# Altium PCB CT_Breakout_Board - Copy.PcbDoc
Units mm, origin at the board's own origin, x right, y up, seen from the top; angles counter-clockwise.
Board outline 45.97 x 47.75 mm, 2 copper layers (Top Layer, Bottom Layer); 32 components, 14 nets, 74 pads, 10 vias.
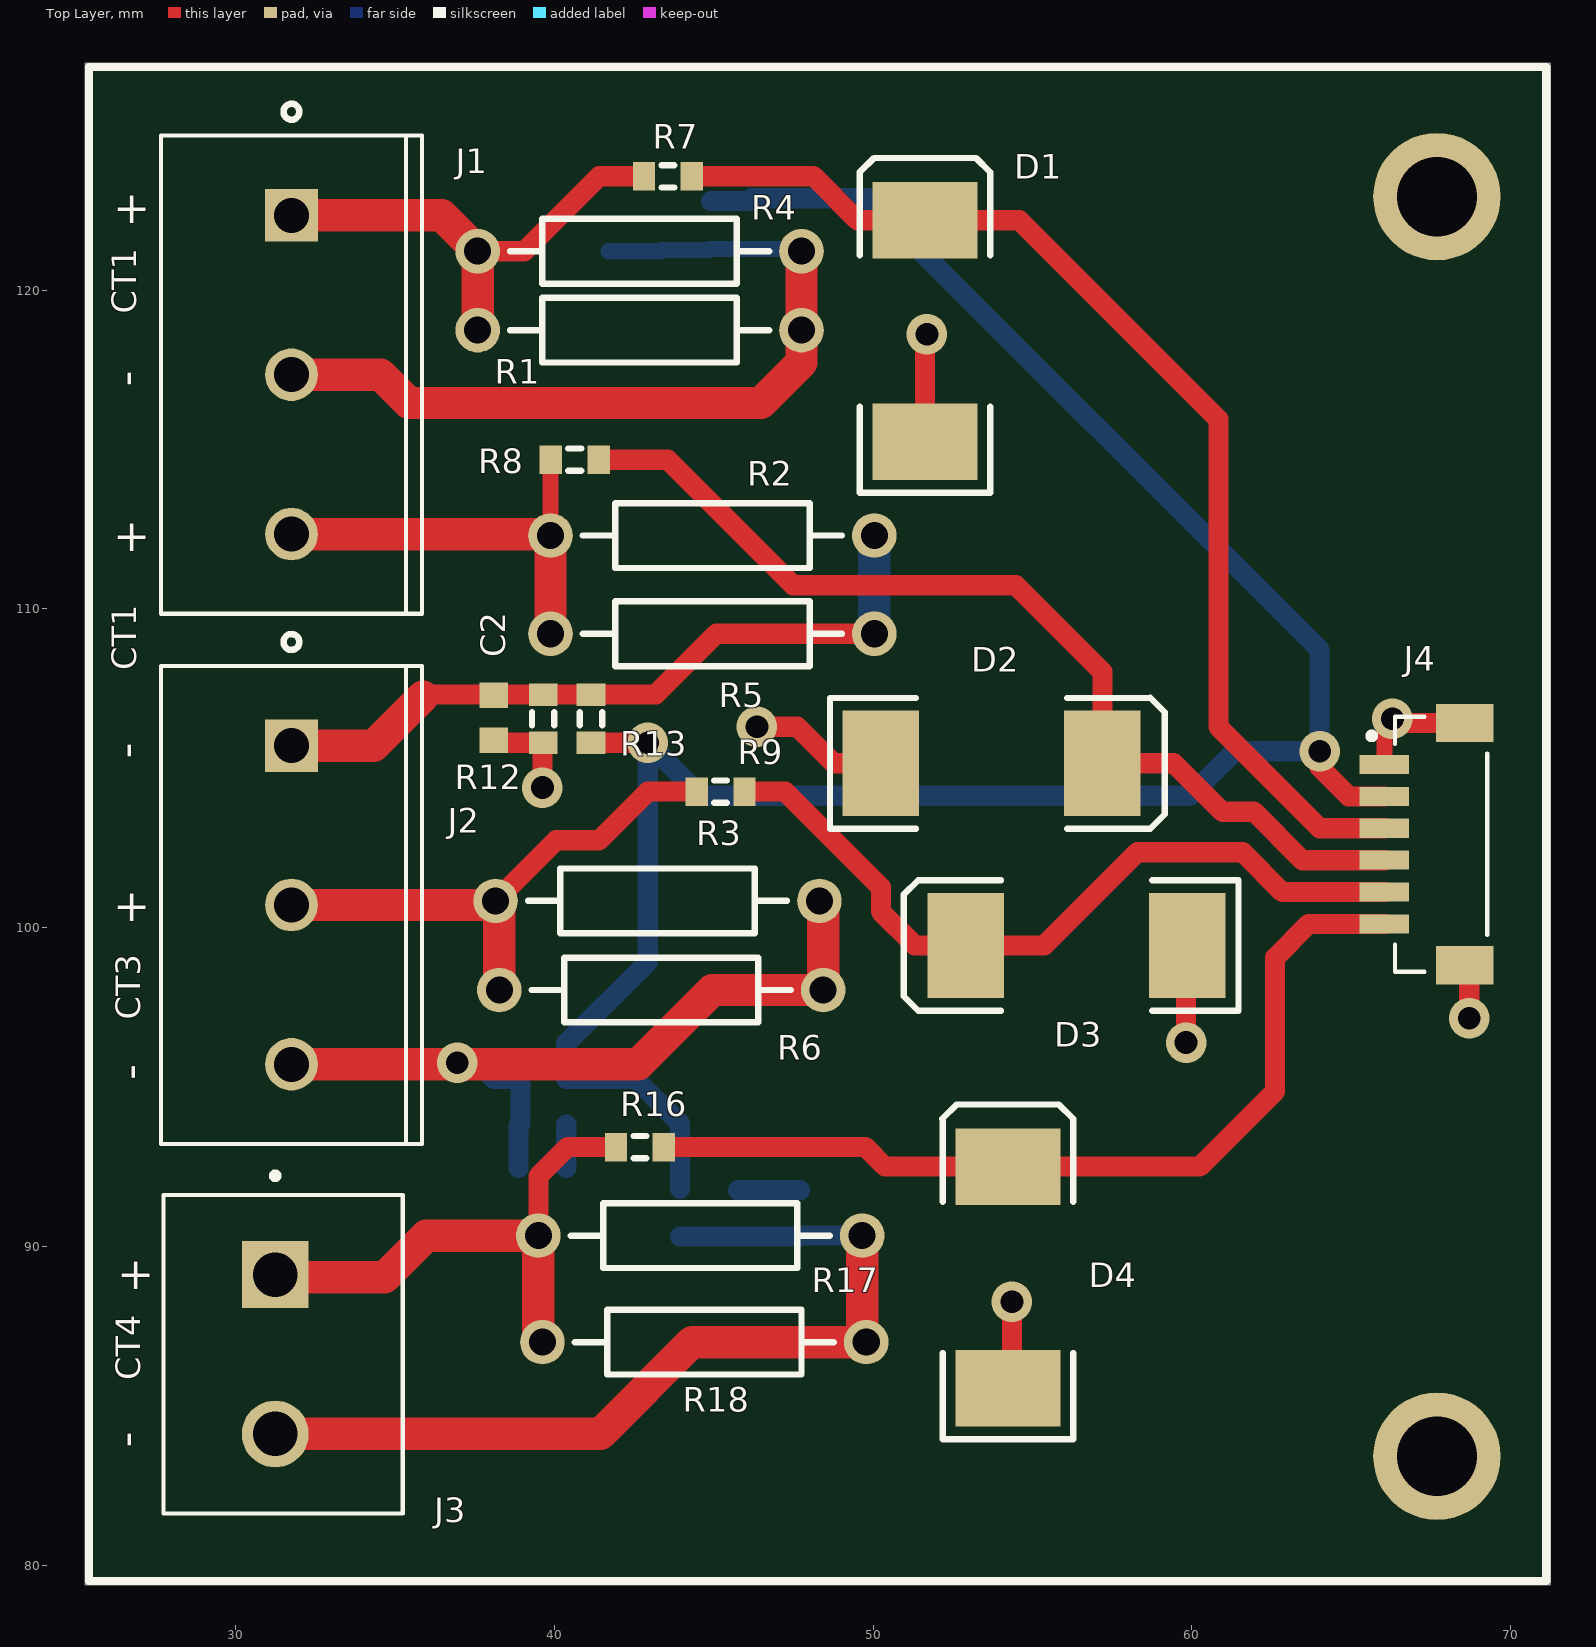
[diagram p0: Top Layer view]
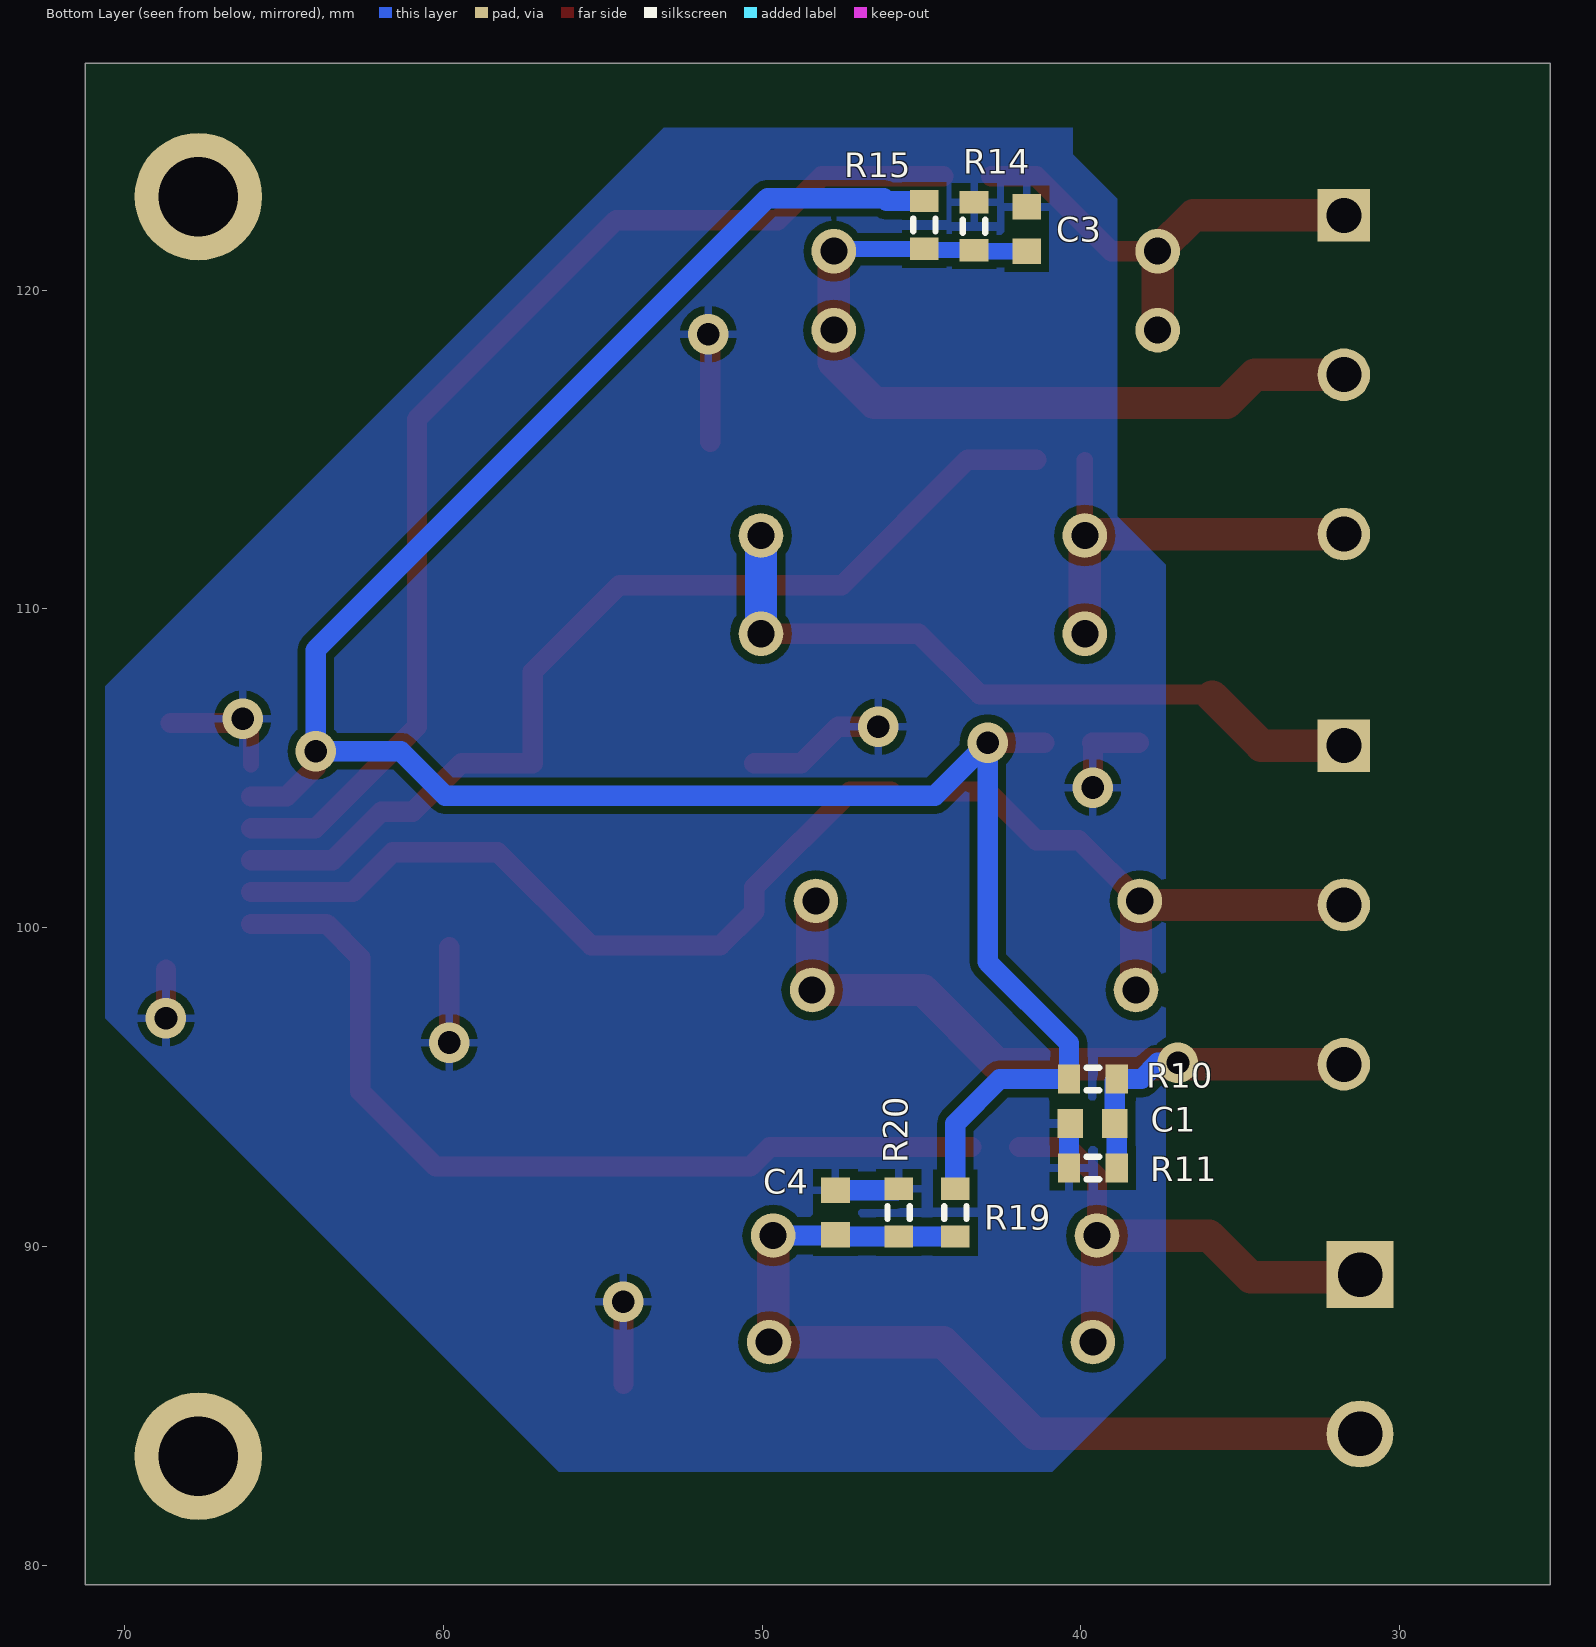
[diagram p1: Bottom Layer view, seen from below]

## Layer stack, top to bottom
Top Solder: solder mask 0.0102, Solder Resist, Dk 3.5
Top Layer: signal copper 0.0356
Dielectric 1: dielectric 0.32, FR-4, Dk 4.8
Bottom Layer: signal copper 0.0356
Bottom Solder: solder mask 0.0102, Solder Resist, Dk 3.5

## Board outline
25.273,79.375 71.247,79.375 71.247,127.127 25.273,127.127

## Design rules (kind name [scope] priority, off if disabled: settings)
Clearance [All] p1: gap=0.254 ignorepadtopadclearanceinfootprint=FALSE except(0: Arc-Hole Track-Hole SMDPad-Hole THPad-Hole Via-Hole Fill-Hole Poly-Hole Region-Hole Text-Hole)
MinimumSolderMaskSliver [All] p1: minsoldermaskwidth=0.127
PolygonConnect [All] p1: connectstyle=Relief reliefconductorwidth=0.254 reliefentries=4 polygonreliefangle="90 Angle" airgapwidth=0.254
RoutingVias [All] p1: holewidth=0.711 width=1.27 viastyle="Through Hole" minholewidth=0.711 minwidth=1.27 maxholewidth=0.711 maxwidth=1.27
SilkToSilkClearance [All] p1: silktosilkclearance=0.076
SilkToSolderMaskClearance [IsPad] p1: minsilkscreentomaskgap=0.076 clearancetoexposedcopper=TRUE
SolderMaskExpansion [All] p1: expansion=0.102
Width [All] p1: maxlimit=1.016 minlimit=0.254 preferedwidth=0.254 minimp=50.000000 maximp=50.000000 favimp=50.000000
27 further rules are at their usual default settings.

## Components (designator, comment, footprint, x,y, rotation, side; value= is the part's Value field where it differs from the comment)
C1 "Cap Semi" 1608[0603] 39.637,93.853 r180 bottom value=10uF/6V
C2 "Cap Semi" 1608[0603] 38.1,106.586 r90 top value=10uF/6V
C3 "Cap Semi" 1608[0603] 41.702,121.92 r270 bottom value=10uF/6V
C4 "Cap Semi" 1608[0603] 47.702,91.059 r270 bottom value=10uF/6V
D1 "Diode" SMC 51.627,118.721 r90 top
D2 "Diode" SMC 53.721,105.156 r0 top
D3 "Diode" SMC 56.388,99.441 r180 top
D4 "Diode" SMC 54.229,89.027 r90 top
J1 "282836-3" TE_282836-3 31.75,117.348 r270 top
J2 "282836-3" TE_282836-3 31.75,100.711 r270 top
J3 "CON22" HANDSON_KF301-2P 31.242,86.614 r270 top
J4 "BM06B-SRSS-TB(LF)(SN)" JST_BM06B-SRSS-TB(LF)(SN) 67.818,102.616 r270 top
R1 "DNC" AXIAL-0.4 42.672,118.745 r180 top value=22
R2 "DNC" AXIAL-0.4 44.958,112.301 r180 top value=22
R3 "DNC" AXIAL-0.4 43.235,100.838 r180 top value=22
R4 "22" AXIAL-0.4 42.672,121.223 r180 top
R5 "22" AXIAL-0.4 44.958,109.22 r180 top
R6 "22" AXIAL-0.4 43.353,98.044 r180 top
R7 "Res3" J1-0603 43.561,123.571 r0 top value=1K
R8 "Res3" J1-0603 40.64,114.681 r0 top value=1K
R9 "Res3" J1-0603 45.212,104.267 r0 top value=1K
R10 "Res3" J1-0603 39.624,95.25 r0 bottom value=470K
R11 "Res3" J1-0603 39.624,92.456 r180 bottom value=470K
R12 "Res3" J1-0603 39.647,106.553 r90 top value=470K
R13 "Res3" J1-0603 41.148,106.553 r270 top value=470K
R14 "Res3" J1-0603 43.353,122.007 r270 bottom value=470K
R15 "Res3" J1-0603 44.912,122.047 r90 bottom value=470K
R16 "Res3" J1-0603 42.684,93.113 r0 top value=1K
R17 "DNC" AXIAL-0.4 44.577,90.337 r180 top value=22
R18 "22" AXIAL-0.4 44.704,86.995 r180 top
R19 "Res3" J1-0603 43.942,91.059 r90 bottom value=470K
R20 "Res3" J1-0603 45.72,91.059 r270 bottom value=470K

## Footprints (in the part's own frame and the unit in brackets; to place one, negate y for a bottom-side part, rotate by r counter-clockwise, add the part's x,y. Pads: shape width x height; smd on the part's side, far side on the other; paste and mask are expansions set on the pad)
1608[0603] [mm] "Chip Capacitor, Body 1.6x0.8mm, IPC High Density"
  rect 0.8x0.9 smd: 1(-0.7,0) 2(0.7,0)
  body extent -0.87,-0.48 0.87,0.48, height 1.3
AXIAL-0.4 [mm] "Axial Device, Thru-Hole; 2 Leads; 0.4 in Pin Spacing"
  round 1.4 hole 0.85: 1(-5.08,0) 2(5.08,0)
  silkscreen extent -4.06,-1.02 4.06,1.02
HANDSON_KF301-2P [mm]
  rect 2.1x2.1 hole 1.4: 1(-2.5,0)
  round 2.1 hole 1.4: 2(2.5,0)
  silkscreen extent -5.7,-3.5 5,4
J1-0603 [mm] "Chip Resistor, Body 1.6x0.8mm, IPC High Density"
  rect 0.7x0.9 smd: 1(-0.75,0) 2(0.75,0)
  silkscreen extent -0.2,-0.35 0.2,0.35, body extent -0.85,-0.48 0.85,0.48, height 0.9
JST_BM06B-SRSS-TB(LF)(SN) [mm]
  rect 0.6x1.55 smd: 1(-2.5,-1.775) 2(-1.5,-1.775) 3(-0.5,-1.775) 4(0.5,-1.775) 5(1.5,-1.775) 6(2.5,-1.775)
  rect 1.2x1.8 smd: S1(-3.8,0.75) S2(3.8,0.75)
  silkscreen extent -4,-2.27 4,1.45
SMC [mm] "DO-214-AB/SMC; 2 C-Bend Leads; Body 7.9 x 5.9 mm, inc. leads (LxW)"
  rect 2.4x3.3 smd: 1(-3.475,0) 2(3.475,0)
  silkscreen extent -5.07,-2.05 5.43,2.05
TE_282836-3 [mm]
  rect 1.65x1.65 hole 1.1: 1(-5,0)
  round 1.65 hole 1.1: 2(0,0) 3(5,0)
  silkscreen extent -8.5,-4.1 7.5,4.1

## Part data
C1 C2 C3 C4: "Capacitor (Semiconductor SIM Model)", LatestRevisionDate=29-May-2009, LatestRevisionNote="IPC-7351 Footprint Added.", PackageDescription="Chip Capacitor", PackageReference=C1206, Published=8-Jun-2000, Publisher="Altium Limited"
D1 D2 D3 D4: "Default Diode", Code_JEDEC=DO-214-AB, LatestRevisionDate=17-Jul-2002, LatestRevisionNote="Re-released for DXP Platform.", PackageDescription="DO-214-AB/SMC; 2 C-Bend Leads; Body 7.9 x 5.9 mm, inc. leads (LxW)", PackageReference=SMC, PackageVersion=Sep-1996, Published=8-Jun-2000, Publisher="Altium Limited"
J1 J2: "Connector, Terminal Block; Wire Receptacle; 3 Pos.; 16-30 AWG; 0.197 in. CL; Sid", Package=None, Availability=Unavailable, Comment_1=CON22, EU_RoHS_Compliance="Compliant with Exemptions", MF="TE Connectivity", MP=282836-3, Price=None, SnapEDA_Link=https://www.snapeda.com/parts/282836-3/TE%20Connectivity%20AMP%20Connectors/view-part/134023/?ref=snap, TE_purchase_URL=https://www.te.com/usa-en/product-282836-3.html?te_bu=Cor&te_type=disp&te_campaign=seda_glo_cor-seda-global-disp-prtnr-fy19-seda-model-bom-cta_sma-317_1&elqCampaignId=32493
J3: library part KF301-2P, "2 Pin Terminal Block 5mm Pitch", Package=Package, Availability=Unavailable, MF="Handson Technology", MP=KF301-2P, Price=None, SnapEDA_Link=https://www.snapeda.com/parts/KF301-2P/Handson%20Technology/view-part/4276957/?ref=snap
J4: "Connector Header Surface Mount 6 position 0.039 (1.00mm)", Package=None, Availability=Unavailable, BuyPart=https://www.snapeda.com/parts/BM06B-SRSS-TB(LF)(SN)/JST%20Sales%20America%20Inc./view-part/317877/?ref=eda, MF="JST Sales", MP=BM06B-SRSS-TB(LF)(SN), Price=None, SnapEDA_Link=https://www.snapeda.com/parts/BM06B-SRSS-TB(LF)(SN)/JST%20Sales%20America%20Inc./view-part/317877/?ref=snap
R1 R2 R3 R4 R5 R6 R17 R18: library part Res2, "Resistor", LatestRevisionDate=17-Jul-2002, LatestRevisionNote="Re-released for DXP Platform.", PackageDescription="Axial Device, Thru-Hole; 2 Leads; 0.4 in Pin Spacing", PackageReference=AXIAL-0.4, Published=8-Jun-2000, Publisher="Altium Limited"
R7 R8 R9 R10 R11 R12 R13 R14 R15 R16 R19 R20: "Resistor", LatestRevisionDate=29-May-2009, LatestRevisionNote="IPC-7351 Footprint Added.", PackageDescription="Chip Resistor", PackageReference=J1-0603, Published=8-Jun-2000, Publisher="Altium Limited"

## Free pads (board coordinates)
  round 4 hole 2.5 unplated: 2(67.691,122.936) 3(67.691,83.414)

## Via types
v1: diameter 1.27, hole 0.711, Top Layer to Bottom Layer, 10 vias

## Nets (pads, with @x,y where several pads share a name; then routed paths per layer and width w, separated by ;. In a path a pad name is that pad's centre, name@x,y a point inside that pad or via, vN(x,y) a via of type N, cw(c..) or ccw(c..) an arc to the next point about the centre after c; other vN are vias at no path point)
GND: C1.1 C2.1 C3.1 C4.1 D1.1 D2.1 D3.1 D4.1 J4.1 J4.S1 J4.S2 R11.1 R12.1 R14.1 R20.1 | length 25.6
  Top Layer w0.254: C2.1 C2.1@38.183,105.803 ; R12.1@39.624,105.78 R12.1 ; v1@51.627,118.556 v1(51.689,118.618) ; D4.1 D4.1@54.356,85.679 ; D3.1@59.817,99.395 D3.1 ; v1@66.043,106.302 v1(66.294,106.553) v1@66.431,106.416 ; J4.S2 J4.S2@68.707,98.677
  Top Layer w0.508: J4.1 v1@66.043,106.302
  Top Layer w0.635: C2.1@38.183,105.803 R12.1 ; v1(39.624,104.394) R12.1@39.624,105.78 ; v1(46.355,106.299) 47.625,106.299 48.768,105.156 D2.1 ; D1.1 v1@51.627,118.556 ; D4.1@54.356,85.679 v1(54.356,88.265) ; v1(59.817,96.393) D3.1@59.817,99.395 ; v1@66.431,106.416 J4.S1 ; v1(68.707,97.155) J4.S2@68.707,98.677
  Bottom Layer w0.254: C1.1 C1.1@40.374,93.816 ; R20.1 R20.1@45.77,91.759
  Bottom Layer w0.635: R11.1 C1.1@40.374,93.816 ; R20.1@45.77,91.759 C4.1
NetC1_2: C1.2 J2.3 R3.1 R6.1 R10.1 R11.2 | length 25.5
  Top Layer w0.254: R3.1 R3.1@48.433,100.72
  Top Layer w1.016: J2.3 42.625,95.711 44.958,98.044 R6.1 R3.1@48.433,100.72
  Bottom Layer w0.254: C1.2@38.874,93.79 C1.2 ; R10.1 R10.1@38.937,95.187
  Bottom Layer w0.635: v1(36.957,95.758) 37.592,95.758 38.1,95.25 R10.1 ; R11.2 C1.2@38.874,93.79 ; C1.2 R10.1@38.937,95.187
NetC2_2: C2.2 J2.1 R2.1 R5.1 R12.2 R13.1 | length 22.8
  Top Layer w0.254: R5.1@49.53,109.22 R5.1@50.038,109.728
  Top Layer w0.635: 36.068,107.315 43.18,107.315 45.085,109.22 R5.1@49.53,109.22
  Top Layer w1.016: J2.1 34.337,105.711 35.877,107.251
  Bottom Layer w1.016: R5.1 R2.1
NetC3_2: C3.2 J1.2 R1.1 R4.1 R14.2 R15.1 | length 26.5
  Top Layer w1.016: J1.2 34.544,117.348 35.433,116.459 46.482,116.459 47.752,117.729 R1.1 R4.1
  Bottom Layer w0.254: R14.2@43.316,121.22 R14.2
  Bottom Layer w0.508: C3.2 R14.2@43.316,121.22 ; R14.2 R15.1@44.872,121.257 ; R15.1@44.849,121.288 R4.1@47.752,121.288
NetC4_2: C4.2 J3.2 R17.1 R18.1 R19.1 R20.2 | length 28.9
  Top Layer w1.016: J3.2 41.442,84.114 44.323,86.995 R18.1 49.657,87.122 R17.1
  Bottom Layer w0.254: C4.2@47.702,90.309 47.752,90.359 C4.2@47.774,90.337
  Bottom Layer w0.635: R19.1 R20.2 C4.2@47.702,90.309 ; C4.2@47.774,90.337 R17.1
NetD1_2: D1.2 J4.3 R7.2 | length 35.9
  Top Layer w0.635: R7.2 48.133,123.571 49.508,122.196 D1.2 54.588,122.196 60.833,115.951 60.833,106.299 64.016,103.116 J4.3
NetD2_2: D2.2 J4.4 R8.2 | length 31.5
  Top Layer w0.635: R8.2 43.561,114.681 47.496,110.746 54.481,110.746 57.196,108.031 D2.2 59.436,105.156 60.96,103.632 61.952,103.632 63.468,102.116 J4.4
NetD3_2: D3.2 J4.5 R9.2 | length 24.3
  Top Layer w0.635: R9.2 47.244,104.267 50.246,101.265 50.246,100.503 51.308,99.441 D3.2 55.372,99.441 58.293,102.362 61.595,102.362 62.841,101.116 J4.5
NetD4_2: D4.2 J4.6 R16.2 | length 28.5
  Top Layer w0.635: R16.2 49.762,93.113 50.373,92.502 D4.2 60.244,92.502 62.611,94.869 62.611,99.06 63.667,100.116 J4.6
NetJ1_1: J1.1 R1.2 R4.2 R7.1 | length 15
  Top Layer w0.635: R4.2 39.054,121.223 41.402,123.571 R7.1
  Top Layer w1.016: J1.1 36.467,122.348 R4.2 R1.2
NetJ1_3: J1.3 R2.2 R5.2 R8.1 | length 13.6
  Top Layer w0.254: R2.2@39.831,112.348 R2.2 ; R8.1@39.878,114.669 R8.1
  Top Layer w0.508: R2.2 R8.1@39.878,114.669
  Top Layer w1.016: J1.3 R2.2@39.831,112.348 ; R5.2 R2.2
NetJ2_2: J2.2 R3.2 R6.2 R9.1 | length 17
  Top Layer w0.254: R3.2@38.028,100.711 R3.2 R3.2@38.273,100.72
  Top Layer w0.635: R3.2 40.06,102.743 41.402,102.743 42.926,104.267 R9.1
  Top Layer w1.016: J2.2 R3.2@38.028,100.711 ; R6.2 R3.2@38.273,100.72
NetJ3_1: J3.1 R16.1 R17.2 R18.2 | length 16.9
  Top Layer w0.635: R17.2 39.497,92.202 40.408,93.113 R16.1
  Top Layer w1.016: J3.1 31.329,89.027 34.671,89.027 35.981,90.337 R17.2 39.497,87.122 R18.2
VCC: J4.2 R10.2 R13.2 R15.2 R19.2 | length 73
  Top Layer w0.635: R13.2 v1(42.926,105.803) ; v1(64.008,105.537) 64.008,105.029 64.921,104.116 J4.2
  Bottom Layer w0.635: R19.2 43.942,93.853 42.545,95.25 R10.2 40.374,96.368 42.926,98.92 v1(42.926,105.803) 44.589,104.14 59.944,104.14 61.341,105.537 v1(64.008,105.537) 64.008,108.712 49.836,122.884 46.188,122.884 46.101,122.797 R15.2

## Polygon pours and split planes (outlines as drawn)
GND on Bottom Layer "Bottom Layer-GND" (solid, pour order 4): 40.259,125.095 40.259,124.258 38.862,122.861 38.862,112.903 37.338,111.379 37.338,86.487 40.894,82.931 56.388,82.931 70.612,97.155 70.612,107.569 53.086,125.095

## Silkscreen, mask and mechanical layers (free items; w line width, h text height)
Top Overlay:
  lines w0.254: 25.4,79.502 26.416,79.502 71.12,79.502 71.12,127 25.4,127 25.4,79.502
  text "+" at 26.162,122.094 h1.02
  text "CT1" at 26.877,119.253 h0.76 r90
  text "-" at 27.051,116.967 h1.02 r90
  text "+" at 26.162,111.807 h1.02
  text "CT1" at 26.877,108.077 h0.76 r90
  text "-" at 27.051,105.305 h1.02 r90
  text "+" at 26.162,100.203 h1.02
  text "CT3" at 27.004,97.109 h0.76 r90
  text "-" at 27.178,95.204 h1.02 r90
  text "+" at 26.289,88.647 h1.02
  text "CT4" at 27.004,85.806 h0.76 r90
  text "-" at 27.051,83.687 h1.02 r90
Mechanical 1:
  lines w0.254: 71.12,114.935 71.12,91.313 71.12,79.502 ; 51.435,79.502 71.12,79.502 ; 51.435,79.502 25.4,79.502 25.4,127 36.893,127 59.627,127 71.12,127 71.12,79.502 ; 51.435,79.502 51.435,79.502